# Altium PCB Control.PcbDoc
Units mil, origin at the board's own origin, x right, y up, seen from the top; angles counter-clockwise.
Board outline 1550 x 700 mil, 2 copper layers (Top Layer, Bottom Layer), stack 60.4 mil thick; 9 components, 7 nets, 26 pads, 5 vias.
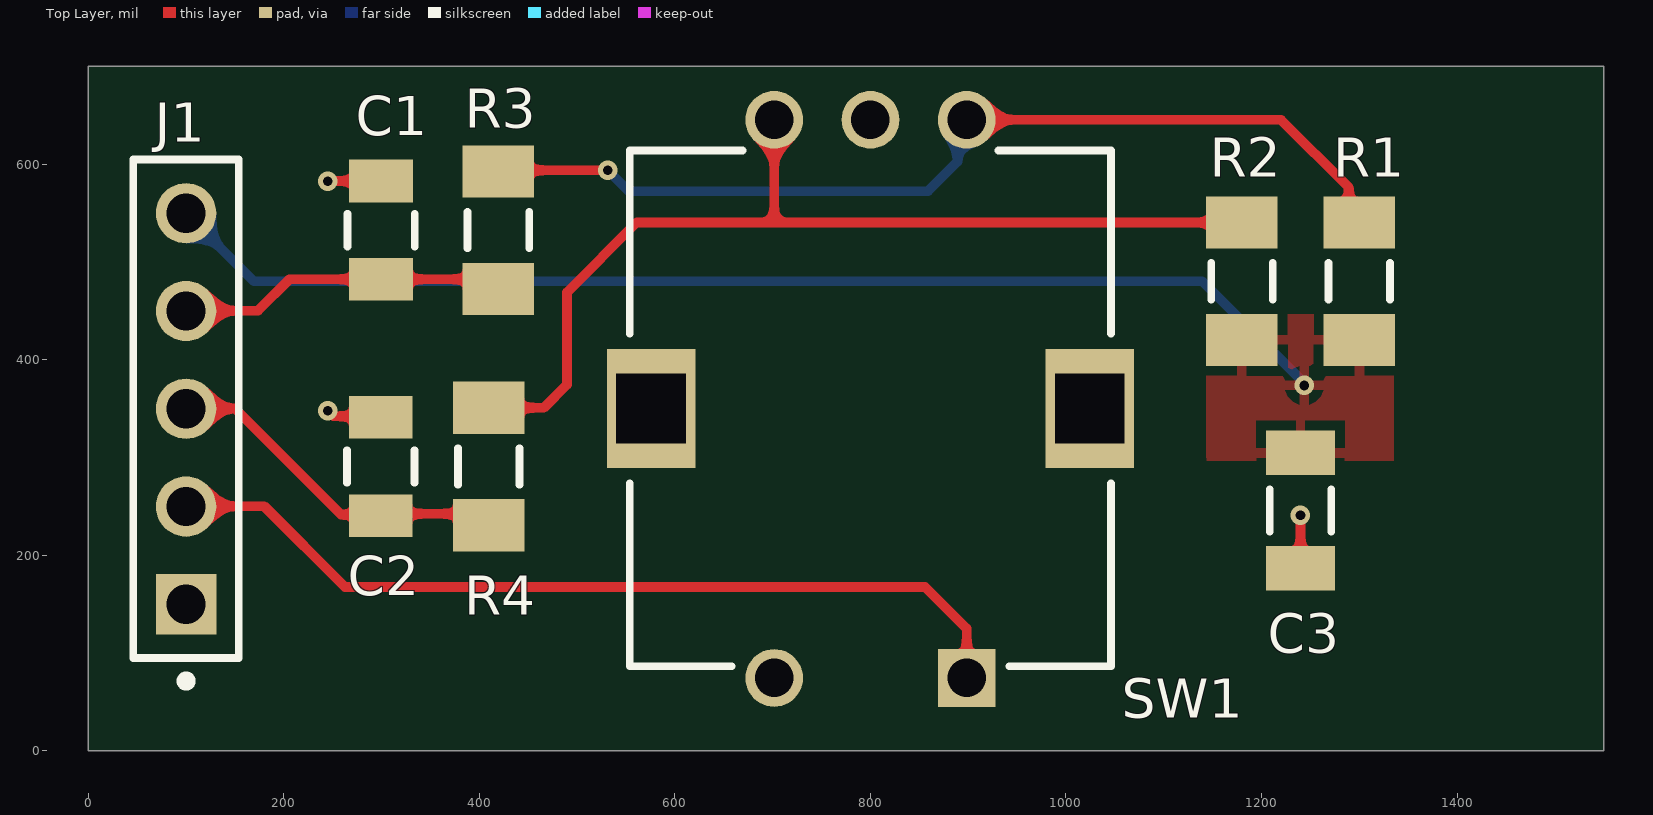
[diagram p0: Top Layer view]
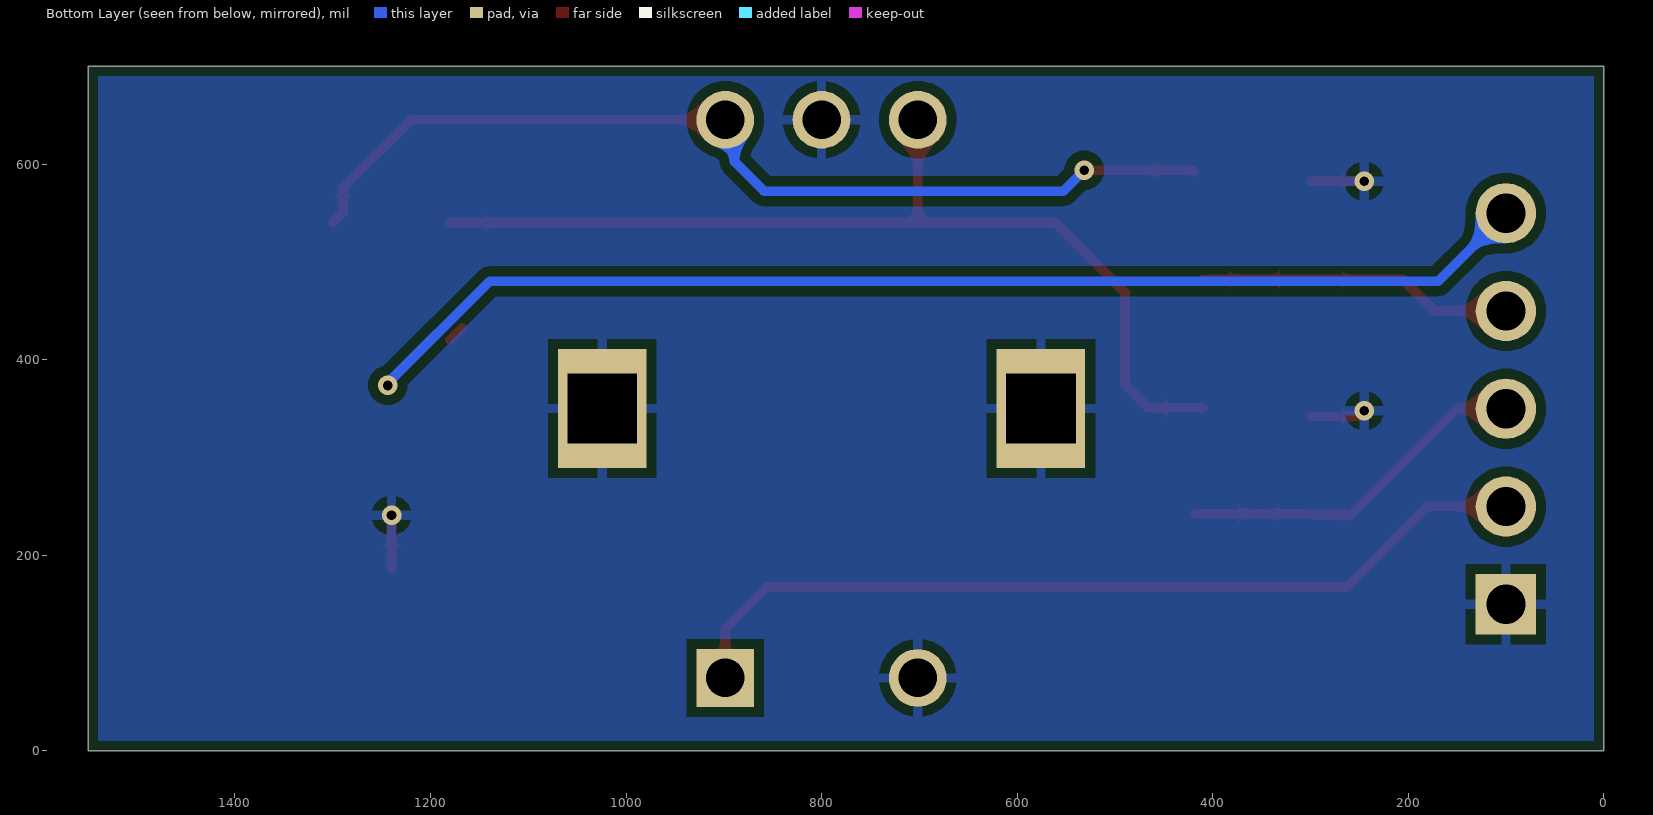
[diagram p1: Bottom Layer view, seen from below]
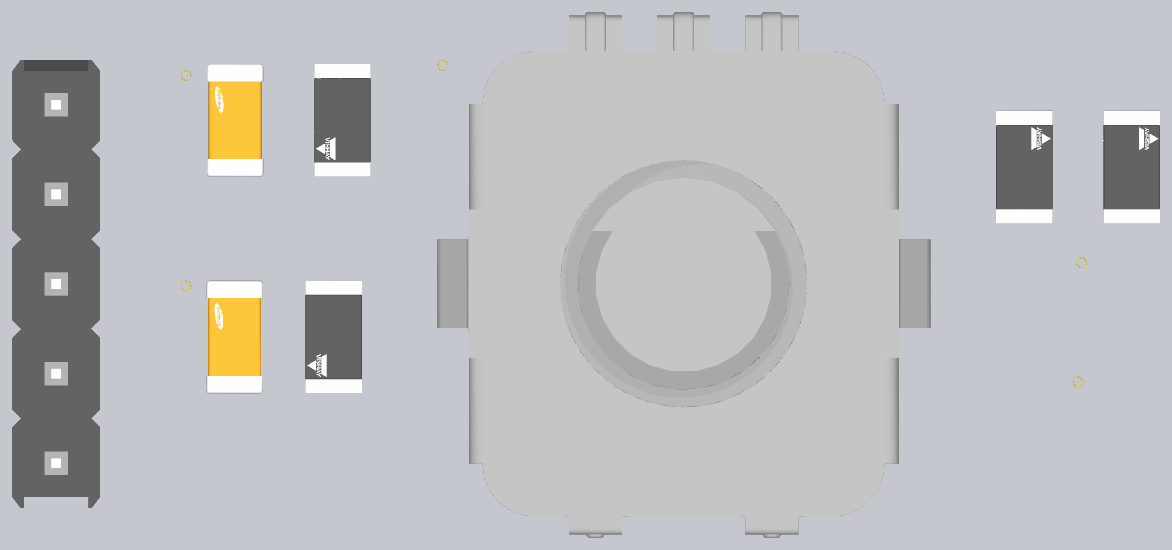
[diagram p2: 3D render of the assembled board from above, using the file's embedded part models]

## Layer stack, top to bottom
Top Solder: solder mask 0.5, Solder Resist, Dk 3.3
Top Layer: signal copper 0.7
Dielectric1: core 59, FR-4, Dk 4.3
Bottom Layer: signal copper 0.7
Bottom Solder: solder mask 0.5, Solder Resist, Dk 3.3

## Board outline
0,0 0,700 1550,700 1550,0

## Design rules (kind name [scope] priority, off if disabled: settings)
BoardOutlineClearance BoardOutlineClearance_1 [All] p1: gap=10 ignorepadtopadclearanceinfootprint=FALSE except(0: Arc-SplitContinuation Track-SplitContinuation SMDPad-SplitContinuation THPad-SplitContinuation Via-SplitContinuation Fill-SplitContinuation Poly-SplitContinuation Region-SplitContinuation Text-SplitContinuation)
Clearance [All] p1: gap=10 ignorepadtopadclearanceinfootprint=FALSE ismatrix=TRUE
HoleSize [All] p1: absolutevalues=TRUE maxlimit=300 minlimit=10 maxpercent=80.000 minpercent=20.000
MinimumAnnularRing [All] p1: minimumring=10
PasteMaskExpansion [All] p1: expansion=10
PlaneClearance [All] p1: clearance=15
PlaneConnect [All] p1: pad.planeconnectstyle=Relief pad.reliefexpansion=20 pad.reliefentries=4 pad.reliefconductorwidth=10 pad.reliefairgap=10 via.planeconnectstyle=Direct via.reliefexpansion=20 via.reliefentries=4 via.reliefconductorwidth=10 via.reliefairgap=10
PolygonConnect [All] p1: connectstyle=Relief reliefconductorwidth=10 reliefentries=4 polygonreliefangle="90 Angle" airgapwidth=10
RoutingVias [All] p1: holewidth=28 width=50 viastyle="Through Hole" minholewidth=28 minwidth=50 maxholewidth=28 maxwidth=50
SMDNeckDown [All] p1: percent=100.000
SilkToSolderMaskClearance SilkscreenOverComponentPads [IsPad] p1: minsilkscreentomaskgap=10 clearancetoexposedcopper=TRUE
SolderMaskExpansion [All] p1: expansion=10 istentingtop=FALSE
SupplyNets "Schematic Supply Nets" [InNet('GND')] p1: voltage=0.000
Width [All] p1: maxlimit=10 minlimit=10 preferedwidth=10
25 further rules are at their usual default settings.

## Classes and differential pairs
component class Control: C1 C2 J1 R1 R2 SW1

## Components (designator, comment, footprint, x,y, rotation, side; value= is the part's Value field where it differs from the comment)
C1 "10n" FP-CL31-IPC_C 299.55,532.41 r90 top
C2 "10n" FP-CL31-IPC_C 299.12,290.61 r90 top
C3 "100n" CAPC1206(3216)100_N 1239.82,245.7 r90 top value=100nF
J1 "22-28-4050" FP-22-28-4050-MFG 100,349.7 r90 top
R1 "10k" FP-CRCW1206-e3-IPC_A 1300,480.08 r90 top
R2 "10k" FP-CRCW1206-e3-IPC_A 1180,480.08 r90 top
R3 "10k" FP-CRCW1206-e3-IPC_A 419.41,532.41 r270 top
R4 "10k" FP-CRCW1206-e3-IPC_A 409.58,290.61 r270 top
SW1 "PEC11R-4215F-S0024" BOUR-PEC11R-4XXXF-SXXXX_V 800,350 r180 top

## Footprints (in the part's own frame and the unit in brackets; to place one, negate y for a bottom-side part, rotate by r counter-clockwise, add the part's x,y. Pads: shape width x height; smd on the part's side, far side on the other; paste and mask are expansions set on the pad)
BOUR-PEC11R-4XXXF-SXXXX_V [mm] "THD, 5-Leads, Body 12.5x13.4mm"
  rect 1.5x1.5 hole 1: 1(-2.5,7)
  round 1.5 hole 1: 2(2.5,7) 3(2.5,-7.5) 4(0,-7.5) 5(-2.5,-7.5)
  rect 2.3x3.1 hole 1.8 square: 6(-5.7,0) 7(5.7,0)
  silkscreen extent -6.25,-6.7 6.25,6.7, body extent -7,-7.7 7,7.2, height 21.61
CAPC1206(3216)100_N [mm] "Chip Capacitor, Body 3.2x1.6mm, Height 1mm, IPC Medium Density"
  rect 1.15x1.8 smd: 1(-1.5,0) 2(1.5,0)
  silkscreen extent -0.55,-0.8 0.55,0.8, body extent -1.7,-0.9 1.7,0.9, height 1
FP-22-28-4050-MFG [mm]
  rect 1.57x1.57 hole 1.02 paste-2539.97 mask+0: 1(-5.08,0)
  round 1.57 hole 1.02 paste-2539.97 mask+0: 2(-2.54,0) 3(0,0) 4(2.54,0) 5(5.08,0)
  silkscreen extent -7.2,-1.37 6.48,1.37, body extent -6.58,-1.47 6.58,1.47, height 0.25
FP-CL31-IPC_C [mil]
  rect 43.52x65.28 smd paste+0 mask+0: 1(-50.25,0) 2(50.25,0)
  silkscreen extent -17,-34 17,34, body extent -76,-38 76,38, height 10
FP-CRCW1206-e3-IPC_A [mil]
  rect 53.39x73.16 smd paste+0 mask+0: 1(-60.08,0) 2(60.08,0)
  silkscreen extent -19,-31 19,31, body extent -106,-56 106,56, height 10

## Part data
C1 C2: library part CMP-13271-002682-1, "Cap Ceramic 10nF 100V X7R ±5% SMD 1206 +125°C Embossed T/R", Capacitance=10nF, Case Code (Imperial)=1206, Case Code (Metric)=3216, Manufacturer Part Number 1=CL31B103JCCNNWC, Max Operating Temperature=125°C, Min Operating Temperature=-55°C, Package Quantity=1, Tolerance=5%, Voltage Rating=100V, Case/Package=1206, Length=0.126inch, Mount="Surface Mount", Packaging="Tape and Reel", Thickness=0.037inch, Width=0.063inch
C3: library part CMP-1037-04190-1, "CAP 100nF 25V ±5% 1206 (3216 Metric) Thickness 1mm SMD", Case-EIA=1206, Case-Metric=3216, Rated Voltage="25 V", Tolerance=Â±5%, Max Thickness="1 mm", Technology=SMT
J1: library part CMP-00257-00278173-1, "22-28-4050 KK® 254 Breakaway Header, Vertical, 5 Circuits, Tin (Sn) Plating, Mating Pin Length 6.09mm", Color=Black, Contact Resistance=20mΩ, Current Rating=4A, Flammability Rating="UL94 V-0", Max Operating Temperature=75°C, Max Voltage Rating (DC)=250.25kV, Min Operating Temperature=0°C, Voltage Rating=250V, Connector Type="Male Pin", Contact Material=Brass, Contact Mating Length=6.096mm, Contact Plating=Tin, Gender=Male, Glow Wire Compliant=Non-compliant, Height=2.29mm, Housing Color=Black, Housing Material=Thermoplastic, Lead Free="Lead Free", Lead Pitch=2.54mm, Length=12.7mm, Mount="Through Hole", NexarPartId=278173, Number of Circuits=5, Number of Contacts=5, Number of Positions=5, Number of Rows=1, Orientation=Vertical, Packaging=Bulk, Pitch=2.54mm, Radiation Hardening=No, REACH SVHC=Unknown, RoHS=Compliant, Schedule B=8536694040, Termination=Solder, Voltage Rating (DC)=250V, Width=2.49mm
R1 R2 R3 R4: library part CMP-2003-04807-2, "RES Thick Film, 10kΩ, 1%, 0.25W, 100ppm/°C, 1206", Case Code (Imperial)=1206, Case Code (Metric)=3216, Max Operating Temperature=155°C, Max Power Dissipation=250mW, Min Operating Temperature=-55°C, Package Quantity=10, Resistance=10kR, Temperature Coefficient=100ppm/°C, Tolerance=1%, Voltage Rating=200V, Case/Package=1206, Composition="Thick Film", Contact Plating=Tin, Depth=1.6mm, Features="Automotive AEC-Q200", Height=0.55mm, Lead Free="Lead Free", Length=3.2mm, Military Standard=Not, Number of Pins=2, Number of Terminations=2, Packaging="Tape and Reel", Power Rating=250mW, Radiation Hardening=No, Termination=SMD/SMT, Voltage Rating (DC)=200V, Weight=0.000353oz, Width=0.063inch, Working Voltage=200V
SW1: library part CMP-011-00007-2, "12 mm Incremental Encoder, 24 Detent, -30 to 70 degC, 5-Pin THD, RoHS, Bulk", Case/Package=PEC11R-4XXXF-SXXXX, Manufacturer=Bourns, Max Operating Temperature=70°C, Min Operating Temperature=-30°C, Package Description="5-Pin Through Hole Device, Body 12.5 x 13.4 mm", Package Quantity=150, Channels=2, Datasheet URL=http://www.bourns.com/docs/Product-Datasheets/PEC11R.pdf, Datasheet Version=Jul-14, Manufacturer URL=http://www.bourns.com/, Mounting Technology=TH, Package Reference=PEC11R-4XXXF-SXXXX, Packaging=Bulk, Product Type=Mechanical, RoHS Compliant=True

## Via types
v1: diameter 20, hole 10, Top Layer to Bottom Layer, 5 vias

## Nets (pads, with @x,y where several pads share a name; then routed paths per layer and width w, separated by ;. In a path a pad name is that pad's centre, name@x,y a point inside that pad or via, vN(x,y) a via of type N, cw(c..) or ccw(c..) an arc to the next point about the centre after c; other vN are vias at no path point)
A: R1.2 R3.1 SW1.5 | length 997.9
  Top Layer w10: R3.1@419.53,592.37 420.75,593.59 v1(531.4,593.59) ; SW1.5 1220.01,645.28 1289.29,576 1289.29,550.88 R1.2
  Bottom Layer w10: v1(531.4,593.59) 552.73,572.26 858.9,572.26 889.04,602.4 889.04,635.89 SW1.5
A_Filtered: C1.1 J1.4 R3.2 | length 323
  Top Layer w10: J1.4 100.3,450 173.65,450 205.8,482.16 C1.1 R3.2@409.58,482.16
B: R2.2 R4.1 SW1.3 | length 1009.3
  Top Layer w10: R4.1 465.85,350.69 489.53,374.37 489.53,468.78 560.91,540.16 701.58,540.16 ; SW1.3 701.58,540.16 ; R2.2 701.58,540.16
B_Filtered: C2.1 J1.3 R4.2 | length 362.1
  Top Layer w10: J1.3 100.3,350 150.03,350 258.56,241.47 C2.1@299.55,241.47 ; C2.1@300.31,242.24 R4.2@417.82,242.24
BTN: J1.2 SW1.1 | length 900.8
  Top Layer w10: J1.2 100.3,250 180,250 262.6,167.4 855.85,167.4 898.43,124.82 SW1.1
GND: C1.2 C2.2 C3.1 J1.1 SW1.2 SW1.4 SW1.6 SW1.7 | length 150.2
  Top Layer w10: v1@250.71,341.97 C2.2@299.55,341.97 ; v1@252.25,582.66 C1.2 ; C3.1 v1(1239.82,240.7)
  other v1: 245,347.68 245,582.32
VCC: C3.2 J1.5 R1.1 R2.1 | length 1235.6
  Top Layer w10: R2.1@1167.54,432.46 R2.1
  Bottom Layer w10: J1.5 169.62,480.08 1139.47,480.08 1243.74,375.82 v1(1243.74,373.62)

## Polygon pours and split planes (outlines as drawn)
VCC on Top Layer "VCC_L01_P003" (solid, pour order 3): 1143.51,446.25 1336.13,446.25 1336.5,445.88 1335.02,444.39 1335.02,296.6 1143.84,296.6 1143.69,296.44 1143.51,296.62 1143.51,446.37
GND on Bottom Layer "GND_L02_P000" (solid, pour order 0): 0,700 1550,700 1550,0 0,0 0,700

## Silkscreen, mask and mechanical layers (free items; w line width, h text height)
Board:
  the board outline again, w10
Mechanical1:
  lines w10: 0,700 0,700 ; 1550,0 1550,0